# Altium PCB model_14.pcbdoc
Units mil, origin at the board's own origin, x right, y up, seen from the top; angles counter-clockwise.
Board outline 4982.81 x 6410.95 mil, 2 copper layers (Top Layer, Bottom Layer); 117 components, 106 nets, 381 pads, 47 vias.
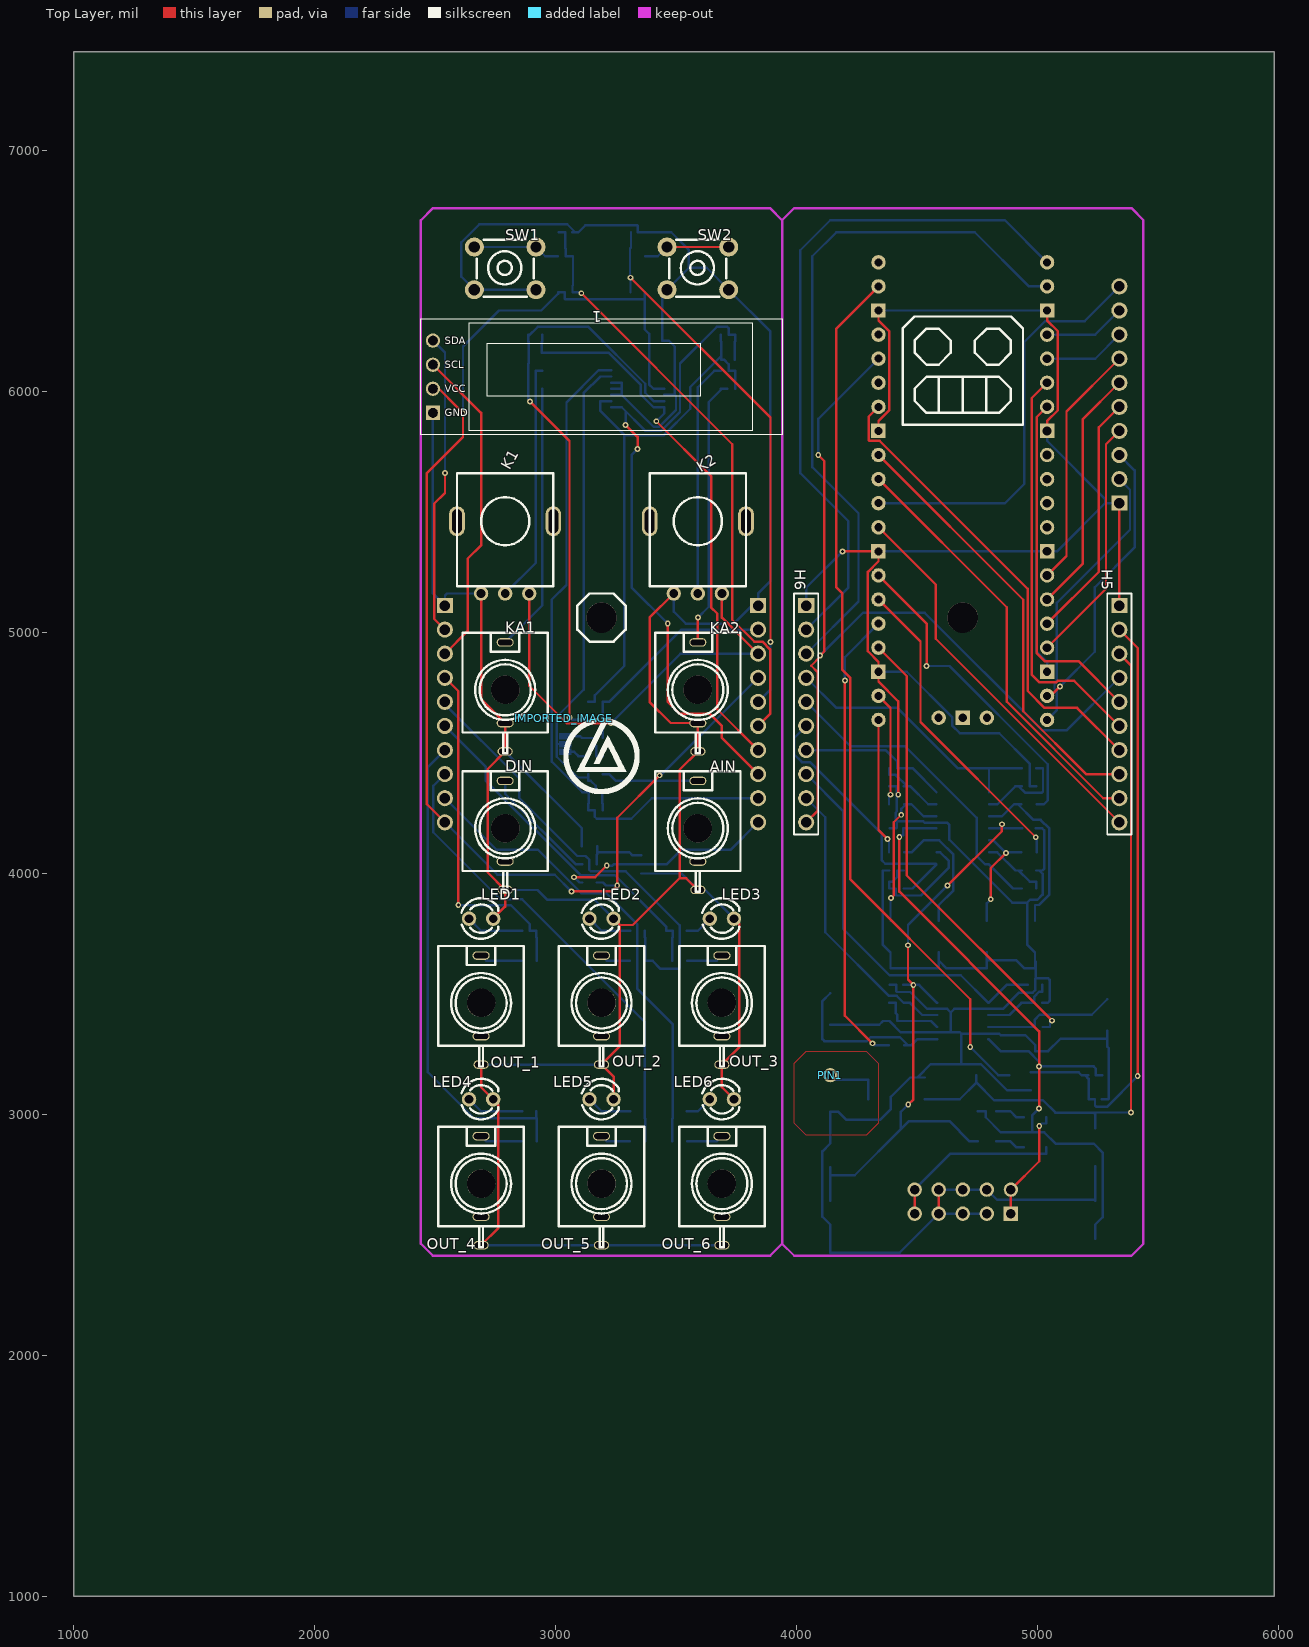
[diagram p0: Top Layer view]
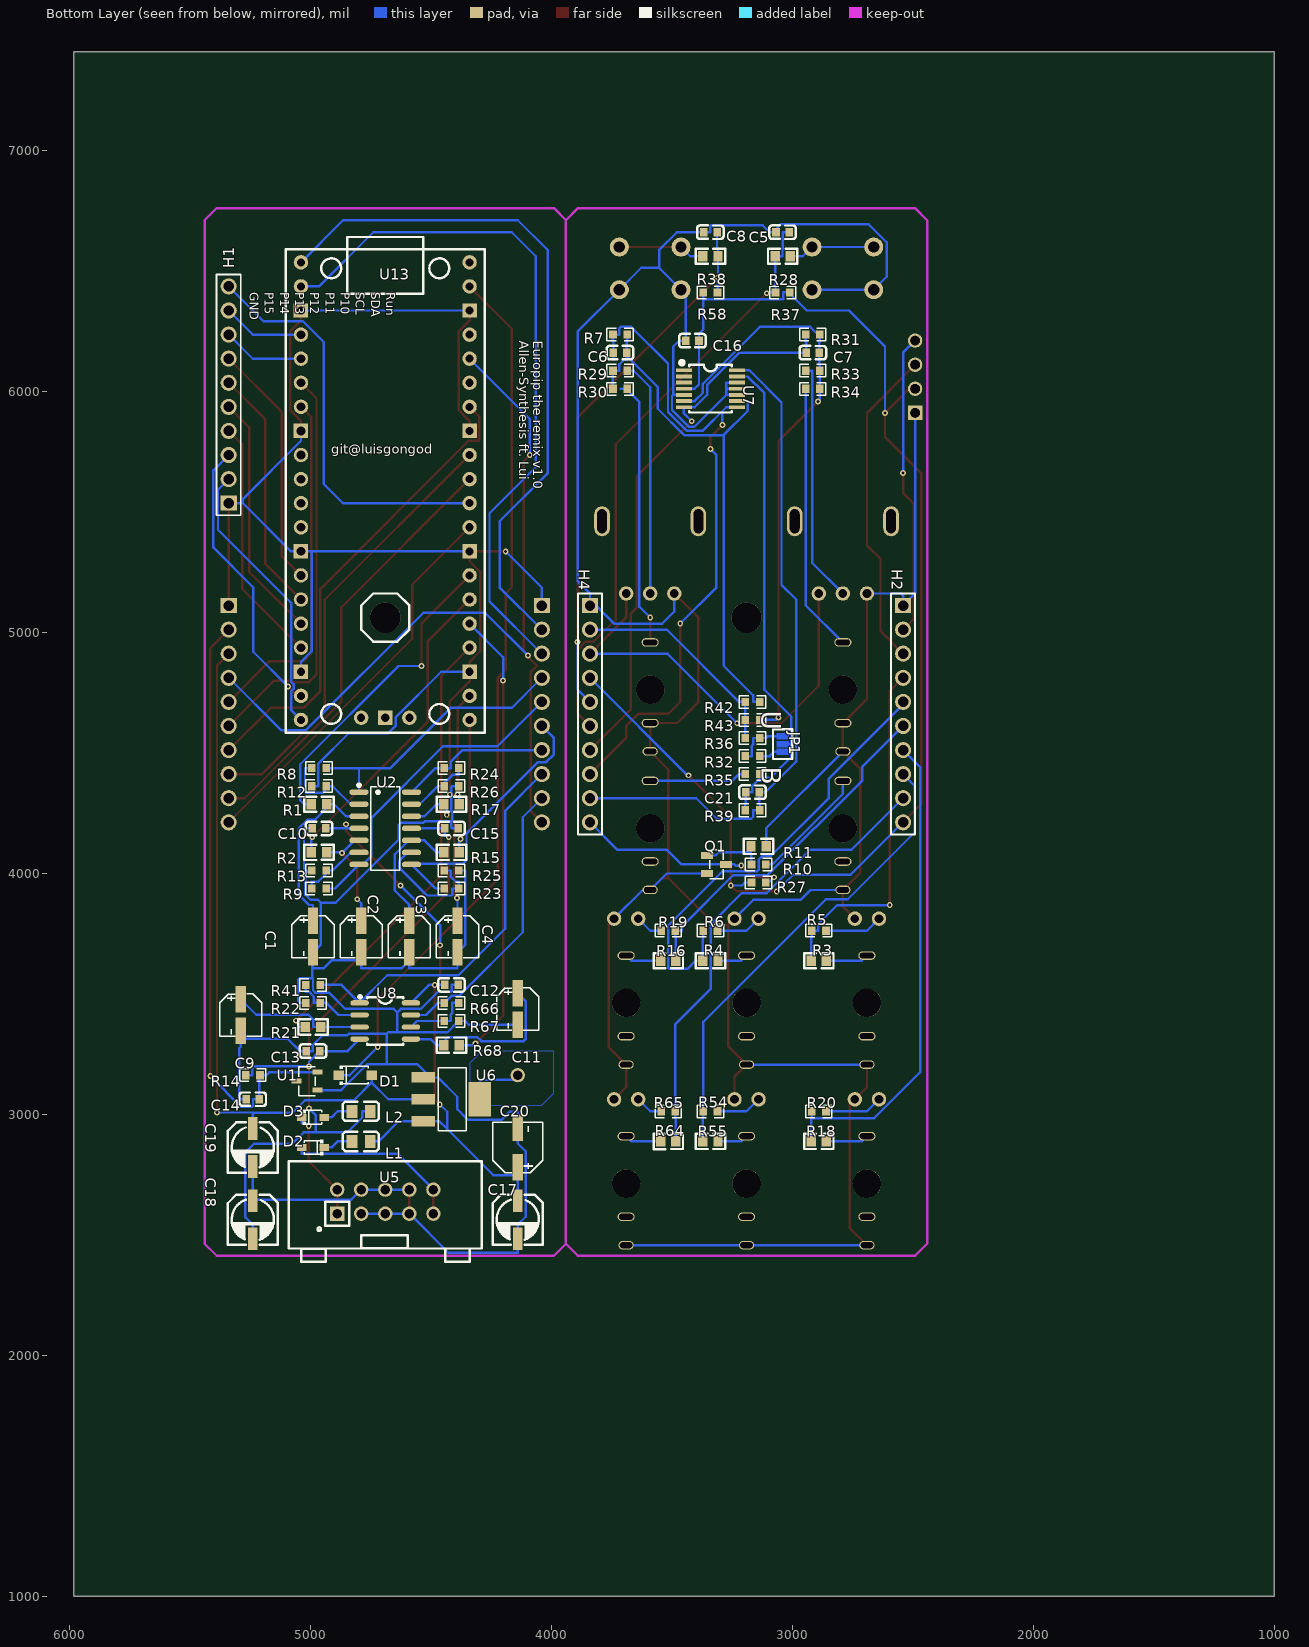
[diagram p1: Bottom Layer view, seen from below]

## Layer stack, top to bottom
Top Layer: signal copper (thickness not stored)
Dielectric: dielectric 12.6, FR-4, Dk 4.8
Bottom Layer: signal copper (thickness not stored)

## Board outline
5982.81,1000 1000,1000 1000,7410.95 5982.81,7410.95

## Components (designator, comment, footprint, x,y, rotation, side; value= is the part's Value field where it differs from the comment)
1 "DISPLAY-OLED-128X32" DISPLAY-OLED-128X32 3190.32,6062.53 r0 top
AIN "THONKICONN JACK" THONKICONN_JACK 3590.32,4187.53 r0 top
C1 "0.1uF" CAP-SMD_BD4.0-L4.3-W4.3-FD 4990.31,3737.53 r90 bottom
C2 "0.1uF" CAP-SMD_BD4.0-L4.3-W4.3-FD 4790.31,3737.53 r90 bottom
C3 "0.1uF" CAP-SMD_BD4.0-L4.3-W4.3-FD 4590.31,3737.53 r90 bottom
C4 "0.1uF" CAP-SMD_BD4.0-L4.3-W4.3-FD 4390.31,3737.53 r90 bottom
C5 "100nF" C0603 3040.32,6662.53 r0 bottom
C6 "10nF" C0603 3715.32,6162.53 r0 bottom
C7 "10nF" C0603 2915.32,6162.53 r180 bottom
C8 "100nF" C0603 3340.32,6662.53 r0 bottom
C9 "0.1uF" CAP-SMD_BD4.0-L4.3-W4.3-FD 5290.31,3412.53 r90 bottom
C10 "100nF" C0603 4965.31,4187.53 r180 bottom
C11 "0.1uF" CAP-SMD_BD4.0-L4.3-W4.3-FD 4140.31,3437.53 r90 bottom
C12 "100nF" C0603 4415.31,3537.53 r0 bottom
C13 "100nF" C0603 4990.31,3262.54 r0 bottom
C14 "100nF" C0603 5240.31,3062.54 r0 bottom
C15 "100nF" C0603 4415.31,4187.53 r180 bottom
C16 "100nF" C0603 3415.31,6212.53 r180 bottom
C17 "22uF" CAP-SMD_BD5.0-L5.3-W5.3-FD#1 4140.31,2562.54 r90 bottom
C18 "22uF" CAP-SMD_BD5.0-L5.3-W5.3-FD#1 5240.31,2562.54 r90 bottom
C19 "22uF" CAP-SMD_BD5.0-L5.3-W5.3-FD#1 5240.31,2862.54 r90 bottom
C20 "10uF" CAP-SMD_BD5.0-L5.3-W5.3-FD#2 4140.31,2862.54 r270 bottom
C21 "10nF" C0603 3165.32,4337.53 r0 bottom
D1 "1N4148W_C81598" SOD-123F_L2.7-W1.6-LS3.8-RD 4815.31,3162.54 r0 bottom
D2 "1N5819WS" SOD-323_L1.8-W1.3-LS2.5-RD 4990.31,2862.54 r180 bottom
D3 "1N5819WS" SOD-323_L1.8-W1.3-LS2.5-RD 4990.31,2987.54 r0 bottom
DIN "THONKICONN JACK" THONKICONN_JACK 2790.32,4187.53 r0 top
H1 "Header-Male-2.54_1x10" HDR-TH_10P-P2.54-V-M-1#1 5340.31,5987.53 r270 bottom
H2 "Header-Male-2.54_1x10" HDR-TH_10P-P2.54-V-M-1#1 2540.32,4662.53 r90 bottom
H4 "Header-Male-2.54_1x10" HDR-TH_10P-P2.54-V-M-1#1 3840.32,4662.53 r90 bottom
H5 "Header-Male-2.54_1x10" HDR-TH_10P-P2.54-V-M-1#2 5340.31,4662.53 r270 top
H6 "Header-Male-2.54_1x10" HDR-TH_10P-P2.54-V-M-1#2 4040.32,4662.53 r270 top
IMPORTED_IMAGE "IMPORTED_IMAGE" IMPORTED_IMAGE 3032.93,4645.01 r0 top
JP1 "JUMPER 3P NEW" JUMPERS_SMT-JUMPER_3_NC_PASTE_NO-SILK 3040.32,4537.53 r90 bottom
K1 "B100K" ALPHA9MM_TRIM 2790.32,5462.53 r0 top
K2 "B100K" ALPHA9MM_TRIM 3590.32,5462.53 r0 top
KA1 "THONKICONN JACK" THONKICONN_JACK 2790.32,4762.53 r0 top
KA2 "THONKICONN JACK" THONKICONN_JACK 3590.32,4762.53 r0 top
L1 "600Ω" L0805 4790.31,2887.54 r0 bottom
L2 "600Ω" L0805 4790.31,3012.54 r0 bottom
LED1 "204-10SURD/S530-A3-L" LED-TH_BD3.0-P2.54-FD 2690.32,3812.53 r0 top
LED2 "204-10SURD/S530-A3-L" LED-TH_BD3.0-P2.54-FD 3190.32,3812.53 r0 top
LED3 "204-10SURD/S530-A3-L" LED-TH_BD3.0-P2.54-FD 3690.32,3812.53 r0 top
LED4 "204-10SURD/S530-A3-L" LED-TH_BD3.0-P2.54-FD 2690.32,3062.53 r0 top
LED5 "204-10SURD/S530-A3-L" LED-TH_BD3.0-P2.54-FD 3190.32,3062.53 r0 top
LED6 "204-10SURD/S530-A3-L" LED-TH_BD3.0-P2.54-FD 3690.32,3062.53 r0 top
OUT_1 "THONKICONN JACK" THONKICONN_JACK 2690.32,3462.53 r0 top
OUT_2 "THONKICONN JACK" THONKICONN_JACK 3190.32,3462.53 r0 top
OUT_3 "THONKICONN JACK" THONKICONN_JACK 3690.32,3462.53 r0 top
OUT_4 "THONKICONN JACK" THONKICONN_JACK 2690.32,2712.53 r0 top
OUT_5 "THONKICONN JACK" THONKICONN_JACK 3190.32,2712.53 r0 top
OUT_6 "THONKICONN JACK" THONKICONN_JACK 3690.32,2712.53 r0 top
PIN1 "PAD" PADPAD 4140.31,3162.53 r0 top
Q1 "MMBT3904-C20526" SOT-23-3_L2.9-W1.3-P1.90-LS2.4-BR 3315.32,4037.53 r180 bottom
R1 "1K" R0603#1 4965.31,4287.53 r0 bottom
R2 "1K" R0603#1 4965.31,4087.53 r0 bottom
R3 "1K" R0603#1 2890.32,3637.53 r0 bottom
R4 "1K" R0603#1 3340.32,3637.53 r0 bottom
R5 "4.7kΩ" R0603#2 2890.32,3762.53 r0 bottom
R6 "4.7kΩ" R0603#2 3340.32,3762.53 r0 bottom
R7 "100kΩ" R0603#2 3715.32,6237.53 r0 bottom
R8 "220kΩ" R0603#2 4965.31,4437.53 r0 bottom
R9 "220kΩ" R0603#2 4965.31,3937.53 r0 bottom
R10 "100kΩ" R0603#2 3140.32,4037.53 r180 bottom
R11 "1M" R0603#1 3140.32,4112.53 r180 bottom
R12 "100kΩ" R0603#2 4965.31,4362.53 r0 bottom
R13 "100kΩ" R0603#2 4965.31,4012.53 r0 bottom
R14 "10kΩ" R0603#2 5240.31,3162.54 r0 bottom
R15 "1K" R0603#1 4415.31,4087.53 r180 bottom
R16 "1K" R0603#1 3515.32,3637.53 r180 bottom
R17 "1K" R0603#1 4415.31,4287.53 r180 bottom
R18 "1K" R0603#1 2890.32,2887.54 r0 bottom
R19 "4.7kΩ" R0603#2 3515.32,3762.53 r180 bottom
R20 "4.7kΩ" R0603#2 2890.32,3012.53 r0 bottom
R21 "1K" R0603#1 4990.31,3362.53 r0 bottom
R22 "100kΩ" R0603#2 4990.31,3462.53 r0 bottom
R23 "220kΩ" R0603#2 4415.31,3937.53 r180 bottom
R24 "220kΩ" R0603#2 4415.31,4437.53 r180 bottom
R25 "100kΩ" R0603#2 4415.31,4012.53 r180 bottom
R26 "100kΩ" R0603#2 4415.31,4362.53 r180 bottom
R27 "10kΩ" R0603#2 3140.32,3962.53 r180 bottom
R28 "1K" R0603#1 3040.32,6562.53 r180 bottom
R29 "150kΩ" R0603#2 3715.32,6087.53 r0 bottom
R30 "150kΩ" R0603#2 3715.32,6012.53 r0 bottom
R31 "100kΩ" R0603#2 2915.32,6237.53 r180 bottom
R32 "300kΩ" R0603#2 3165.32,4487.53 r0 bottom
R33 "150kΩ" R0603#2 2915.32,6087.53 r0 bottom
R34 "150kΩ" R0603#2 2915.32,6012.53 r0 bottom
R35 "300kΩ" R0603#2 3165.32,4412.53 r0 bottom
R36 "300kΩ" R0603#2 3165.32,4562.53 r0 bottom
R37 "10kΩ" R0603#2 3040.32,6412.53 r0 bottom
R38 "1K" R0603#1 3340.32,6562.53 r0 bottom
R39 "100kΩ" R0603#2 3165.32,4262.53 r0 bottom
R41 "220kΩ" R0603#2 4990.31,3537.53 r0 bottom
R42 "300kΩ" R0603#2 3165.32,4712.53 r0 bottom
R43 "300kΩ" R0603#2 3165.32,4637.53 r0 bottom
R54 "4.7kΩ" R0603#2 3340.32,3012.53 r0 bottom
R55 "1K" R0603#1 3340.32,2887.54 r0 bottom
R58 "10kΩ" R0603#2 3340.32,6412.53 r180 bottom
R64 "1K" R0603#1 3515.32,2887.54 r180 bottom
R65 "4.7kΩ" R0603#2 3515.32,3012.53 r180 bottom
R66 "220kΩ" R0603#2 4415.31,3462.53 r180 bottom
R67 "100kΩ" R0603#2 4415.31,3387.53 r180 bottom
R68 "1K" R0603#1 4415.31,3287.53 r180 bottom
SW1 "TL1105SPF250Q" KEY-TH_4P-L6.0-W6.0-P4.50-LS7.5 2790.32,6512.53 r0 top
SW2 "TL1105SPF250Q" KEY-TH_4P-L6.0-W6.0-P4.50-LS7.5 3590.32,6512.53 r0 top
U1 "LM4040C10IDBZR" SOT-23-3_L3.0-W1.7-P0.95-LS2.9-BR 5015.31,3137.54 r0 bottom
U2 "TL074CDR" SOIC-14_L8.7-W3.9-P1.27-LS6.0-BL 4690.31,4187.53 r90 bottom
U5 "1761608-3" IDC-TH_10P-P2.54-S2.54_L9.2-W20.3 4690.31,2637.54 r0 bottom
U6 "LM1117MP-5.0/TR" SOT-223-3_L6.5-W3.4-P2.30-LS7.0-BR 4415.31,3062.54 r180 bottom
U7 "MCP6004T-I/ST" TSSOP-14_L5.0-W4.4-P0.65-LS6.4-BL 3340.32,6012.53 r90 bottom
U8 "TL072CDT" SOIC-8_L5.0-W4.0-P1.27-LS6.0-BL 4690.31,3387.53 r90 bottom
U13 "RASPBERRY-PI-PICO" RASPBERRY-PI-PICO 4690.31,5587.53 r0 bottom
? "" ? 1996.16,4587.53 r0 top
? "" ? 3190.32,2323.75 r0 top
? "" ? 3940.32,1982.27 r0 top
? "" ? 4690.31,2160.84 r0 top

## Footprints (in the part's own frame and the unit in brackets; to place one, negate y for a bottom-side part, rotate by r counter-clockwise, add the part's x,y. Pads: shape width x height; smd on the part's side, far side on the other; paste and mask are expansions set on the pad)
ALPHA9MM_TRIM [mil]
  round 60 hole 35.98: 1(-100,-300)
  round 60 hole 36: 2(0,-300) 3(100,-300)
  oval 65x125 hole 40 slot 100 at 90 deg: 4(-200,0) 4(200,0)
  silkscreen extent -200,-270 200,200
C0603 [mm]
  rect 0.8x0.9 smd: 1(0.7,0) 2(-0.7,0)
  silkscreen extent -1.39,-0.72 1.41,0.71
CAP-SMD_BD4.0-L4.3-W4.3-FD [mm]
  rect 2.8x1.1 smd: 1(1.66,0) 2(-1.66,0)
  silkscreen extent -2.24,-2.23 2.22,2.23
CAP-SMD_BD5.0-L5.3-W5.3-FD#1 [mm]
  rect 2.4x1 smd: 1(2,0) 2(-2,0)
  silkscreen extent -2.65,-2.65 2.65,2.65
CAP-SMD_BD5.0-L5.3-W5.3-FD#2 [mm]
  rect 2.8x1.1 smd: 1(2.1,0) 2(-2.1,0)
  silkscreen extent -2.66,-2.65 2.66,2.62
DISPLAY-OLED-128X32 [mil]
  rect 59.37x59.37 hole 39.36: 1(-700,-150)
  round 59.37 hole 39.36: 2(-700,-50) 3(-700,50) 4(-700,150)
  silkscreen extent -750,-240 750,240
HDR-TH_10P-P2.54-V-M-1#1 [mm]
  rect 1.575x1.7 hole 1.1: 1(11.43,0)
  round 1.7 hole 1.1: 2(8.89,0) 3(6.35,0) 4(3.81,0) 5(1.27,0) 6(-1.27,0) 7(-3.81,0) 8(-6.35,0) 9(-8.89,0) 10(-11.43,0)
  silkscreen extent -12.7,-1.27 12.7,1.27
HDR-TH_10P-P2.54-V-M-1#2 [mm]
  rect 1.575x1.7 hole 1.1: 1(-11.43,0)
  round 1.7 hole 1.1: 2(-8.89,0) 3(-6.35,0) 4(-3.81,0) 5(-1.27,0) 6(1.27,0) 7(3.81,0) 8(6.35,0) 9(8.89,0) 10(11.43,0)
  silkscreen extent -12.7,-1.27 12.7,1.27
IDC-TH_10P-P2.54-S2.54_L9.2-W20.3 [mil]
  rect 60x60 hole 39.37: 1(199.94,50.05)
  round 60 hole 39.37: 2(200.04,-50.05) 3(99.96,50.01) 4(100.04,-50.05) 5(-0.04,50.01) 6(0.04,-50.05) 7(-100.04,50.01) 8(-99.96,-50.05) 9(-200.04,50.01) 10(-199.96,-50.05)
  silkscreen extent -400,-167 400,250
IMPORTED_IMAGE [mil]
  silkscreen extent 0,-315 315,0
JUMPERS_SMT-JUMPER_3_NC_PASTE_NO-SILK [mil]
  round 0 smd: 1(32,0) 2(0,0) 3(-32,0)
  Top Layer region: 12.5,-25 -12.5,-25 -12.5,25 12.5,25
  Top Layer region: -19.5,-25 -44.5,-25 -44.5,25 -19.5,25
  Top Layer region: 44.5,-25 19.5,-25 19.5,25 44.5,25
  silkscreen extent -62,-40 62,40
KEY-TH_4P-L6.0-W6.0-P4.50-LS7.5 [mm]
  round 2 hole 1.2: 1(-3.25,-2.25) 2(3.25,-2.25) 3(3.25,2.25) 4(-3.25,2.25)
  silkscreen extent -3,-3 3,3
L0805 [mil]
  rect 44.59x54.21 smd: 1(38.05,0) 2(-38.04,0)
  silkscreen extent -73,-40 77,40
LED-TH_BD3.0-P2.54-FD [mil]
  round 60 hole 36: 1(-50,0) 2(50,0)
  silkscreen extent -81,-84 72,85
PADPAD [mm]
  round 1.5 hole 1: 1(0,0)
R0603#1 [mm]
  rect 1x1.1 smd: 1(0.8,0) 2(-0.8,0)
  silkscreen extent -1.55,-0.81 1.55,0.8
R0603#2 [mm]
  rect 0.806x0.864 smd: 1(0.753,0) 2(-0.753,0)
  silkscreen extent -1.39,-0.66 1.39,0.66
RASPBERRY-PI-PICO [mil]
  round 60 hole 33.46: 1(350,-950) 2(350,-850) 19(350,850) 20(350,950) 21(-350,950) 22(-350,850) 24(-350,650) 25(-350,550) 26(-350,450) 27(-350,350) 29(-350,150) 30(-350,50) 31(-350,-50) 32(-350,-150) 34(-350,-350) 35(-350,-450) 36(-350,-550) 37(-350,-650) 39(-350,-850) 40(-350,-950) 41(100,940.94) 43(-100,940.94)
  rect 60x60 hole 33.46: 3(350,-750) 18(350,750) 23(-350,750) 28(-350,250) 33(-350,-250) 38(-350,-750) 42(0,940.94)
  round 60 hole 36: 4(350,-650) 5(350,-550) 6(350,-450) 7(350,-350) 9(350,-150) 10(350,-50) 11(350,50) 12(350,150) 14(350,350) 15(350,450) 16(350,550) 17(350,650)
  rect 60x60 hole 36: 8(350,-250) 13(350,250)
  silkscreen extent -413,-1055 413,1004
SOD-123F_L2.7-W1.6-LS3.8-RD [mm]
  rect 1.1x1 smd: 1(1.735,0) 2(-1.735,0)
  silkscreen extent -1.38,-1 1.6,1
SOD-323_L1.8-W1.3-LS2.5-RD [mm]
  rect 1x0.75 smd: 1(1.173,0) 2(-1.173,0)
  silkscreen extent -0.9,-0.8 1.08,0.8
SOIC-8_L5.0-W4.0-P1.27-LS6.0-BL [mil]
  oval 22.38x76.78 smd: 1(75,106.5) 2(25,106.5) 3(-25,106.5) 4(-75,106.5) 5(-75,-106.5) 6(-25,-106.5) 7(25,-106.5) 8(75,-106.5)
  silkscreen extent -98,-75 106,111
SOIC-14_L8.7-W3.9-P1.27-LS6.0-BL [mil]
  oval 22.6x80.24 smd: 1(150,109.02) 2(100,109.02) 3(50,109.02) 4(0,109.02) 5(-50,109.02) 6(-100,109.02) 7(-150,109.02) 8(-150,-109.02) 9(-100,-109.02) 10(-50,-109.02) 11(0,-109.02) 12(50,-109.02) 13(100,-109.02) 14(150,-109.02)
  silkscreen extent -173,-60 185,115
SOT-23-3_L2.9-W1.3-P1.90-LS2.4-BR [mm]
  rect 1.25x0.7 smd: 1(-1,0.95) 2(-1,-0.95) 3(1,0)
  silkscreen extent -0.73,-1.53 0.73,1.53
SOT-23-3_L3.0-W1.7-P0.95-LS2.9-BR [mm]
  rect 1.037x0.532 smd: 1(-1.101,0.95) 2(-1.101,-0.95) 3(1.101,0)
  silkscreen extent -0.86,-1.53 0.86,1.53
SOT-223-3_L6.5-W3.4-P2.30-LS7.0-BR [mm]
  rect 2.5x1.1 smd: 1(-2.97,2.3) 2(-2.97,0) 3(-2.97,-2.3)
  rect 2.34x3.6 smd: 4(2.97,0)
  silkscreen extent -1.37,-3.33 1.57,3.33
THONKICONN_JACK [mm]
  oval 1.6x0.9 hole 0.6 slot 1.3 at 0 deg: 1(0,-6.5)
  oval 1.8x0.9 hole 0.6 slot 1.5 at 0 deg: 2(0,-3.5) 3(0,5)
  round 3 hole 3 unplated: ""(0,0)
  silkscreen extent -4.5,-6.7 4.5,6
TSSOP-14_L5.0-W4.4-P0.65-LS6.4-BL [mm]
  rect 0.4x1.7 smd: 1(1.95,2.8) 2(1.3,2.8) 3(0.65,2.8) 4(0,2.8) 5(-0.65,2.8) 6(-1.3,2.8) 7(-1.95,2.8) 8(-1.95,-2.8) 9(-1.3,-2.8) 10(-0.65,-2.8) 11(0,-2.8) 12(0.65,-2.8) 13(1.3,-2.8) 14(1.95,-2.8)
  silkscreen extent -2.5,-2.25 2.95,3.2
? [mil]

## Free pads (board coordinates)
  round 125.98 hole 125.98 unplated: ""(3190.32,5062.53) ""(4690.32,5062.53)

## Via types
v1: diameter 24.02, hole 12.01, Top Layer to Bottom Layer, tented both sides, 40 vias
v2: diameter 24.41, hole 12, Top Layer to Bottom Layer, tented both sides, 6 vias
v3: diameter 24.02, hole 12, Top Layer to Bottom Layer, tented both sides, 1 vias

## Nets (pads, with @x,y where several pads share a name; then routed paths per layer and width w, separated by ;. In a path a pad name is that pad's centre, name@x,y a point inside that pad or via, vN(x,y) a via of type N, cw(c..) or ccw(c..) an arc to the next point about the centre after c; other vN are vias at no path point)
3V3: H5.4 H6.10 U13.36 | length 3699.3
  Top Layer w10: H6.10 4087.11,4259.32 4087.11,4836.46 4061.04,4862.53 4098.14,4899.63 v1(4098.14,4904.71) ; v1(4090.32,5737.53) 4115.31,5712.53 4115.32,4921.93 v1(4098.14,4904.71)
  Bottom Layer w10: v1(4090.32,5737.53) 4090.32,5887.54 U13.36 ; v1(4098.14,4904.71) 4275.91,5082.48 4531.82,5082.48 5019.18,4595.12 5122.9,4595.12 H5.4
3V3P: 1.2 C16.1 H2.10 H4.4 R27.2 R37.2 R58.2 U7.4 | length 5613.8
  Top Layer w10: 1.2 2515.32,6012.53 2590.32,5937.53 v3(2615.32,5912.53) 2615.32,5812.53 2465.32,5662.53 2465.32,4287.52 H2.10 ; v1(3065.26,3925.69) 3231.16,3925.69 v1(3255.76,3950.29) 3255.76,4231.52 v1(3431.8,4407.56)
  Bottom Layer w10: H2.10 2758.09,3994.76 2996.19,3994.76 v1(3065.26,3925.69) ; v3(2615.32,5912.53) 2615.32,6187.53 2765.32,6337.53 2940.32,6337.53 3010.66,6407.87 R37.2 3037.53,6412.53 3037.53,6385.66 3038.73,6384.46 3369.98,6384.46 ; R27.2 3196.84,3962.53 3209.08,3950.29 v1(3255.76,3950.29) ; R58.2 3369.98,6384.46 ; v1(3431.8,4407.56) 3435.35,4407.56 H4.4 ; U7.4 3406.1,6012.53 3387.76,6030.87 C16.1 3387.76,6226.89 3387.76,6241.24 3369.98,6259.02 3369.98,6384.46
5V: C19.1 D1.2 H5.3 U6.2 | length 2960.8
  Top Layer w10: H5.3 5388.84,4864 v1(5388.84,3007.56)
  Bottom Layer w10: U6.2 4677.68,3062.54 4747.01,3131.87 ; D1.2 4747.01,3135.84 4747.01,3131.87 ; C19.1 5240.31,2999.52 5235.23,3004.6 5235.23,3007.11 ; v1(5388.84,3007.56) 5235.68,3007.56 5235.23,3007.11 ; 4747.01,3131.87 4820.34,3058.54 5023.3,3058.54 5074.73,3007.11 5235.23,3007.11
5VP: H4.3 K1.3 K2.3 | length 1828.9
  Top Layer w10: K1.3 2890.32,4779.8 3046.12,4624 v1(3229.25,4624) ; K2.3 3690.32,5062.53 H4.3
  Bottom Layer w10: v1(3229.25,4624) 3517.78,4912.53 H4.3
+12V: C10.1 C12.1 C17.1 C20.1 L1.2 U2.4 U6.3 U8.8 | length 2664.3
  Top Layer w10: v1(4462.75,3702.26) 4462.75,3559.85 v1(4485.06,3537.54) 4485.06,3062.23 v1(4464.1,3041.27) ; v1(4627.05,3949.85) 4852.87,4175.67 v1(4852.87,4204.42)
  Bottom Layer w10: C17.1 C20.1@4140.32,2746.81 ; C20.1 C20.1@4140.32,2746.81 ; C12.1 v1(4485.06,3537.54) 4508.81,3537.54 U8.8 ; v1(4462.75,3702.26) 4462.75,3785.55 v1(4627.05,3949.85) ; v1(4464.1,3041.27) 4433.25,3010.42 4433.25,2938.54 ; L1.2 4718.98,2887.54 4634.53,2971.99 U6.3 4472.04,2971.99 4466.7,2971.99 4433.25,2938.54 ; U2.4 4852.69,4187.54 ; v1(4852.87,4204.42) 4852.69,4204.24 4852.69,4187.54 ; C10.1@4937.75,4187.53 4911.01,4187.53 4852.69,4187.53 ; C20.1@4140.32,2746.81 4241.52,2746.81 4433.25,2938.54
+V: D2.2 U5.9 U5.10 | length 733.8
  Top Layer w10: U5.9 4490.27,2687.51 U5.10@4490.35,2687.59
  Bottom Layer w10: U5.10@4490.35,2687.59 4639.48,2836.72 5036.4,2836.72 5036.47,2836.79 D2.2
-10V: C14.2 H5.2 R14.2 U1.2 | length 2521.1
  Top Layer w10: H5.2 5416.58,4936.26 v1(5416.58,3158.59)
  Bottom Layer w10: U1.2@4971.95,3174.94 5171.39,3174.94 5183.79,3162.54 R14.2@5197.22,3162.54 ; R14.2@5210.65,3162.54 R14.2@5197.22,3162.54 ; v1(5416.58,3158.59) 5288.67,3030.68 5245.18,3030.68 5239.49,3036.37 5239.49,3062.54 5212.75,3062.54 5212.75,3147.01 R14.2@5197.22,3162.54
-10VP: H4.2 R36.1 R42.1 R43.1 | length 919.6
  Bottom Layer w10: R36.1 R43.1 R42.1 3221.84,4712.53 3521.84,5012.53 H4.2
-12V: C13.2 C15.2 C18.2 L2.2 R14.1 U2.11 U8.4 | length 3201.2
  Top Layer w10: v1(4426.95,4151.55) 4426.95,3924.76 5007.07,3344.64 v1(5007.07,3198.96) v1(5007.07,3024.39)
  Bottom Layer w10: v1(4426.95,4151.55) 4434.23,4158.83 4442.87,4158.83 C15.2 U2.11 ; L2.2 4785.55,3012.54 4785.55,2987.58 4847.42,2925.71 4978.42,2925.71 ; U8.4 4846.81,3262.54 4962.75,3262.54 5007.07,3218.22 v1(5007.07,3198.96) 5233.55,3198.96 5243.1,3189.41 5243.1,3162.54 R14.1 ; v1(5007.07,3024.39) 4978.42,2995.74 4978.42,2925.71 ; C18.2 5240.31,2542.04 5271.06,2572.79 5271.06,2841.67 5234.39,2878.34 5075.46,2878.34 5028.09,2925.71 4978.42,2925.71
-V: D3.1 U5.1 U5.2 | length 471.4
  Top Layer w10: U5.1@4890.25,2587.49 4890.25,2687.49 4890.35,2687.59 5008,2805.24 v1(5008,2951.75)
  Bottom Layer w10: v1(5008,2951.75) 5018.04,2961.79 5036.47,2961.79 D3.1
ADC_1: H5.7 U13.34 | length 1978
  Top Layer w10: U13.34 4299.25,5896.47 4299.25,5799.02 4302.16,5796.11 4345.53,5796.11 4959.83,5181.81 4959.83,4757.53 5029.83,4687.53 5165.31,4687.53 H5.7
ADC_1P: C7.2 H4.7 R31.2 U7.7 | length 2312.6
  Top Layer w10: v1(3417.94,5877.55) 3645.32,5650.13 3645.32,5104.63 3670.62,5079.43 3670.62,4682.23 H4.7
  Bottom Layer w10: R31.2 2944.97,6209.53 2942.87,6207.43 C7.2 3219.29,6162.53 3353.92,6027.9 3353.92,5987.94 3406.1,5935.76 U7.7 3450.56,5910.17 v1(3417.94,5877.55)
ADC_2: H5.8 U13.32 | length 1820.1
  Top Layer w10: U13.32 4941.37,5136.47 4941.37,4673.42 5202.26,4412.53 H5.8
ADC_2P: C6.1 H4.8 R7.1 U7.8 | length 2810.4
  Top Layer w10: v2(3290.32,5862.53) 3340.32,5812.53 v2(3340.32,5762.53) ; v2(3465.32,5037.53) 3465.32,4712.53 3515.32,4662.53 3640.32,4662.53 3690.32,4612.53 3690.32,4562.53 H4.8
  Bottom Layer w10: U7.8 3274.53,5935.76 3372.62,5837.67 3437.64,5837.67 3516.28,5916.31 3516.28,6116.92 3669.13,6269.77 3712.73,6269.77 3718.1,6264.4 3718.1,6237.53 R7.1 3744.97,6209.53 3742.87,6207.43 C6.1 3742.87,6133.83 ; v2(3290.32,5862.53) 3290.32,5915.46 ; v2(3340.32,5762.53) 3315.32,5737.53 3315.32,5712.53 3315.32,5187.53 v2(3465.32,5037.53)
AIN: H5.9 U13.31 | length 1778.2
  Top Layer w10: U13.31 4872.68,5105.16 4872.68,4713.61 5273.76,4312.53 H5.9
AIN_3: AIN.3 R35.1 | length 407
  Bottom Layer w10: R35.1 3221.84,4412.53 3249.99,4384.38 AIN.3
AIN_P: C21.2 H4.9 R39.2 U7.14 | length 2809.7
  Bottom Layer w10: U7.14 3178.28,6089.3 3044.98,5956 3044.98,5198.16 2983.79,5136.97 2983.79,4464.76 3111.02,4337.53 C21.2 3137.76,4292.63 3135.66,4290.53 R39.2 3162.53,4262.53 3162.53,4235.66 3170.82,4227.37 3313.69,4227.37 3398.85,4312.53 H4.9
AO_1: H6.4 R8.2 U2.1 | length 1150.7
  Bottom Layer w10: H6.4 4165.32,4687.53 4418.92,4687.53 4668.92,4437.53 4799.34,4437.53 ; U2.1 4799.34,4437.53 ; R8.2 4799.34,4437.53
AO_1P: H2.4 R3.1 R5.1 | length 1476.3
  Top Layer w10: H2.4 2595.8,4757.05 v1(2595.8,3868.92)
  Bottom Layer w10: v1(2595.8,3868.92) 2813.6,3868.92 2893.11,3789.41 2893.11,3762.54 R5.1 2919.98,3748.54 2919.98,3734.54 2921.81,3732.71 R3.1
AO_2: H6.5 R9.2 U2.7 | length 1308.8
  Bottom Layer w10: H6.5 4224.26,4528.59 4450.69,4528.59 4748.17,4231.11 4748.17,4073.26 4783.89,4037.54 U2.7 4899.35,3937.53 R9.2
AO_2P: H2.5 R4.1 R6.1 | length 1897.3
  Bottom Layer w10: H2.5 2540.32,4702.14 2848.52,4393.94 2848.52,4313.84 3089.65,4072.71 3124.34,4072.71 3139.56,4057.49 3139.56,4015.78 3145.9,4009.44 3290.39,4009.44 3515.32,3784.51 3515.32,3609.32 3510.07,3604.07 3435.96,3604.07 3402.49,3637.54 R4.1 3371.81,3732.71 3369.98,3734.54 3369.98,3758.52 R6.1
AO_3: H6.6 R23.2 U2.8 | length 1161.1
  Bottom Layer w10: H6.6 3990.38,4562.59 3990.38,4494.62 4022.49,4462.51 4056.55,4462.51 4353.08,4165.98 4353.08,4055.78 4368.25,4040.61 4578.23,4040.61 U2.8 4481.3,3937.54 R23.2
AO_3P: H2.6 R16.1 R19.1 | length 1466.7
  Bottom Layer w10: H2.6 2709.3,4443.55 2709.3,4386.61 3102.56,3993.35 3245.32,3993.35 3458.8,3779.87 3458.8,3762.54 R19.1 3485.66,3748.54 3485.66,3734.54 3483.83,3732.71 R16.1
AO_4: H6.7 R24.2 U2.14 | length 629.2
  Bottom Layer w10: H6.7 4369.98,4512.53 4418.11,4464.4 4418.11,4437.54 R24.2 4481.3,4437.54 U2.14
AO_4P: H2.7 R18.1 R20.1 | length 2021.9
  Bottom Layer w10: H2.7 2469.64,4441.85 2469.64,3175 2660.17,2984.47 2919.91,2984.47 2919.98,2984.54 ; R20.1 2919.98,3002.38 2919.98,2984.54 ; R18.1 2921.81,2982.71 2919.98,2984.54
AO_5: H6.8 R41.2 U8.1 | length 1631.5
  Bottom Layer w10: H6.8 4192.88,4259.97 4192.88,3770.68 4386.1,3577.46 4681.89,3577.46 U8.1 4871.81,3537.54 R41.2
AO_5P: H2.8 R54.1 R55.1 | length 1962.8
  Bottom Layer w10: H2.8 2491.77,4363.98 2491.77,4171.19 2770.06,3892.9 2860.85,3892.9 3369.98,3383.77 R54.1 3369.98,2998.54 3369.98,2984.54 3371.81,2982.71 R55.1
AO_6: H6.9 R66.2 U8.7 | length 1195.7
  Bottom Layer w10: H6.9 4119.53,4233.32 4119.53,3756.33 4384.25,3491.61 4415.9,3491.61 R66.2 4471.84,3462.54 4521.84,3412.54 U8.7
AO_6P: H2.9 R64.1 R65.1 | length 1978.8
  Bottom Layer w10: H2.9 2754.59,4098.26 2926.43,4098.26 3106.28,3918.41 3210.02,3918.41 3339.57,3788.86 3339.57,3521.11 3485.66,3375.02 R65.1 3485.66,2998.54 3485.66,2984.54 3483.83,2982.71 R64.1
C11_1: C11.1 R68.2 U8.5 | length 730.4
  Bottom Layer w10: C11.1 4107.61,3470.2 4107.61,3312.32 4116.01,3303.92 4291.42,3303.92 4308.4,3320.9 4428.8,3320.9 R68.2@4462.16,3287.54 ; R68.2 R68.2@4462.16,3287.54 ; U8.5 4502.49,3312.54 4477.49,3287.54 R68.2@4462.16,3287.54
D1_1: D1.1 U13.39 | length 3671.4
  Top Layer w10: U13.39 4165.32,6262.53 4165.32,5187.53 4190.32,5162.53 4190.32,4845.13 4223.92,4811.53 4223.92,3975.33 4721.32,3478.03 v1(4721.32,3279.69)
  Bottom Layer w10: v1(4721.32,3279.69) 4838.47,3162.54 D1.1
DIN_1: H5.10 U13.29 | length 1639.2
  Top Layer w10: U13.29 4578.04,5199.8 4578.04,4974.8 H5.10
DIN_3: DIN.3 R10.1 | length 495.3
  Bottom Layer w10: DIN.3 2790.32,4331.01 3083.8,4037.53 R10.1
DIN_P: H4.10 Q1.3 R27.1 | length 901.7
  Top Layer w10: v1@3076.4,3984.56 3163.95,3984.56 v1(3212.05,4032.66)
  Bottom Layer w10: v1(3076.4,3984.55) 3098.42,3962.53 R27.1 ; v1(3212.05,4032.66) 3235.48,4032.66 3240.35,4037.53 Q1.3 3459.8,4037.53 3520.52,4098.25 3726.04,4098.25 H4.10
GND: C1.2 C2.2 C3.2 C4.2 C9.2 C10.2 C11.2 C12.2 C13.1 C14.1 C15.1 C17.2 C18.1 C19.2 C20.2 H1.1 H5.1 H6.1 R12.1 R13.1 R22.1 R25.1 R26.1 R67.1 U1.1 U5.3 U5.4 U5.5 U5.6 U5.7 U5.8 U6.1 U13.3 U13.8 U13.13 U13.18 U13.23 U13.28 U13.33 U13.38 | length 15577.9
  Top Layer w10: v2(4190.32,5337.53) U13.28 4340.31,5296.54 4296.1,5252.33 4296.1,5112.53 4296.1,4922.73 4340.31,4878.52 4340.31,4858.03 4340.31,4855.21 4340.31,4846.37 4340.31,4844.48 U13.23 4340.31,4796.54 4422.44,4714.41 v1(4422.44,4327.36) ; U13.33 4340.31,5878.52 4384.51,5922.72 4384.51,6252.34 4340.31,6296.54 U13.38 ; U5.7 4590.27,2687.51 U5.8@4590.35,2687.59 ; U13.8 5040.31,5878.52 5084.51,5922.72 5084.51,6252.34 5040.31,6296.54 U13.3 ; H5.1 H1.1
  Bottom Layer w10: H6.1 4040.32,5187.53 v2(4190.32,5337.53) ; C11.2 4343.42,3372.16 4358.8,3387.54 R67.1 4432.91,3340.29 4640.28,3340.29 ; U13.23 4457.98,4837.53 4645.98,4649.53 4645.98,4614.71 4678.53,4582.16 4841.95,4582.16 4968.03,4456.08 4968.03,4362.6 4968.1,4362.53 R12.1 ; U13.28 4995.94,5337.53 ; U13.38 U13.3 ; R25.1 4358.8,4012.54 4357.62,4011.36 4357.62,3704.86 C4.2 4390.32,3606.05 4590.32,3606.05 C3.2@4590.32,3639.11 ; R26.1 4412.53,4362.54 4416.07,4359 v1@4416.07,4327.36 ; C12.2@4387.75,3537.54 4414.49,3537.54 4414.49,3510.8 4417.47,3507.82 4472.4,3507.82 4542.68,3437.54 4625.67,3437.54 4640.28,3422.93 ; C15.1 4414.49,4187.54 4416.07,4189.12 4416.07,4216.32 ; v1(4422.44,4327.36) v1@4416.07,4327.36 ; U6.1 U6.1@4502.15,3153.09 ; C3.2 C3.2@4590.32,3639.11 ; U5.8@4590.35,2687.59 4690.35,2687.59 4790.35,2687.59 4832.38,2645.56 C18.1@5240.31,2645.56 ; U5.3 U5.5 U5.7 4428.31,2425.57 4140.32,2425.57 4140.32,2454.69 C17.2 4140.32,2542.04 4107.29,2575.07 4107.29,2846.08 4140.32,2879.11 C20.2 4140.32,3011.33 4172.96,3011.33 4206.02,2978.27 4348.28,2978.27 4391.75,3021.74 4391.75,3072.8 4472.04,3153.09 U6.1@4502.15,3153.09 ; C2.2 C2.2@4790.31,3639.11 ; U1.1@4971.95,3100.14 4873.83,3100.14 4766.01,3207.96 4684.12,3207.96 ; C10.2 5019.61,4187.53 5027.9,4179.24 5027.9,4018.6 5021.83,4012.53 R13.1@5008.4,4012.53 ; R13.1 R13.1@5008.4,4012.53 ; R22.1 5042.87,3462.54 5050.91,3470.58 5050.91,3558.42 5043.72,3565.61 4993.41,3565.61 ; U13.18 5040.31,4878.52 4995.94,4922.89 4995.94,5337.53 ; U13.8 5040.31,5796.54 5281.3,5555.55 5281.3,5537.53 ; C18.1 C18.1@5240.31,2645.56 ; C19.2 C18.1@5240.31,2645.56 ; C14.1 5294.61,3062.54 5296.9,3064.83 5296.9,3274.46 5290.31,3281.05 C9.2@5290.31,3314.11 ; C9.2 C9.2@5290.31,3314.11 ; H1.1 5281.3,5537.53 ; 4416.07,4216.32 4411.9,4220.49 4411.9,4253.15 4416.07,4257.32 v1@4416.07,4327.36 ; 4416.07,4216.32 4526,4216.32 4532.42,4209.9 4626.26,4209.9 4634.97,4201.19 4634.97,4140.2 4896.48,3878.69 4957.6,3878.69 ; U6.1@4502.15,3153.09 4557.02,3207.96 4684.12,3207.96 ; C3.2@4590.32,3639.11 4623.38,3606.05 4790.31,3606.05 C2.2@4790.31,3639.11 ; 4640.28,3340.29 4640.28,3422.93 ; 4640.28,3340.29 4678.89,3340.29 4684.12,3335.06 ; 4640.28,3422.93 4654.89,3437.54 4856.7,3437.54 4924.32,3505.16 4980.57,3505.16 4990.5,3515.09 4990.5,3562.7 4993.41,3565.61 ; 4684.12,3207.96 4684.12,3335.06 ; 4684.12,3335.06 4841.03,3335.06 4847.83,3328.26 4950.06,3328.26 4991.13,3287.19 4991.13,3262.54 C13.1 5044.61,3262.54 5096.18,3314.11 C9.2@5290.31,3314.11 ; C2.2@4790.31,3639.11 4913.36,3639.11 4946.42,3606.05 4990.31,3606.05 C1.2@4990.31,3636.74 ; 4957.6,3878.69 4969.71,3890.8 5000.2,3890.8 5021.91,3912.51 5021.91,3999.02 R13.1@5008.4,4012.53 ; 4957.6,3878.69 4957.6,3704.87 C1.2 C1.2@4990.31,3636.74 ; C1.2@4990.31,3636.74 4993.41,3633.64 4993.41,3565.61 ; 4995.94,5337.53 U13.13 5060.81,5337.53 5081.3,5337.53 5281.3,5537.53
GNDP: 1.1 AIN.1 C5.1 C8.1 C16.2 DIN.1 H2.1 H4.1 K1.1 K2.1 KA1.1 KA1.2 KA2.1 KA2.2 LED1.2 LED2.2 LED3.2 LED4.2 LED5.2 LED6.2 OUT_1.1 OUT_2.1 OUT_3.1 OUT_4.1 OUT_5.1 OUT_6.1 Q1.2 R11.1 SW1.1 SW1.2 SW2.1 SW2.2 U7.5 U7.10 U7.11 U7.12 | length 14666.4
  Top Layer w10: OUT_4.1 2762.44,2528.74 2762.44,3040.41 LED4.2 2690.32,3112.53 OUT_1.1 ; K1.1 2690.32,4724.74 KA1.2 KA1.1 2717.73,4434.03 2717.73,4004.21 DIN.1 2790.32,3862.53 LED1.2 ; LED5.2 3240.32,3156.62 OUT_2.1 3266.81,3283.11 3266.81,3786.04 ; LED2.2 3266.81,3786.04 ; K2.1 3390.32,5062.53 3390.32,4712.53 3478.11,4624.74 KA2.2 KA2.1 3514.61,4430.91 3514.61,3980.31 ; AIN.1 3541.63,3980.31 3514.61,3980.31 ; LED6.2 3690.32,3112.53 OUT_3.1 3762.95,3279.25 3762.95,3789.9 LED3.2 ; 3266.81,3786.04 3320.34,3786.04 3514.61,3980.31
  Bottom Layer w10: 1.1@2499.65,5912.53 1.1 2490.32,5162.53 H2.1 2540.32,5154.53 2548.32,5162.53 K1.1 ; OUT_4.1 OUT_5.1 OUT_6.1 ; OUT_1.1 OUT_2.1 ; DIN.1 2924.31,3931.62 2965.55,3890.38 3162.47,3890.38 LED2.2 ; KA1.1 3108.83,4188.11 R11.1 ; SW1.2 SW1.1 2607.97,6478.35 2607.97,6620.41 2683.47,6695.91 3047.87,6695.91 C5.1@3081.25,6662.53 ; C5.1 C5.1@3081.25,6662.53 ; U7.10 3274.53,5986.94 ; U7.11 3274.53,6012.53 ; U7.12 3274.53,6038.12 3274.53,6012.53 ; Q1.2 3521.81,4000.13 AIN.1 3621.23,3931.62 LED3.2 ; U7.5 3493.35,5986.94 3495.01,5986.94 ; K2.1 3490.32,5087.53 3540.32,5037.53 3740.32,5037.53 3815.31,5112.53 H4.1 3840.32,5162.53 3890.32,5212.53 3890.32,6251.9 SW2.2 3627.23,6514.99 3553.41,6514.99 ; C5.1@3081.25,6662.53 3094.62,6662.53 3123.4,6691.31 3339.1,6691.31 3341.14,6689.27 3341.14,6662.53 3358.48,6662.53 C8.1 3479.69,6662.53 3553.41,6588.81 3553.41,6514.99 ; 3274.53,5986.94 3407.15,5854.32 3429.56,5854.32 3499.72,5924.48 3499.72,5982.23 3495.01,5986.94 ; 3274.53,5986.94 3274.53,6012.53 ; 3495.01,5986.94 3495.08,5987.01 3495.08,6187.06 3469.61,6212.53 C16.2 3442.87,6404.45 SW2.1 3553.41,6514.99
GP10: H1.7 U13.14 | length 1024.3
  Top Layer w10: U13.14 5120.93,5318.15 5120.93,5918.15 H1.7
GP11: H1.6 U13.15 | length 1024.3
  Top Layer w10: U13.15 5187.87,5285.09 5187.87,5885.09 H1.6
GP12: H1.5 U13.16 | length 1024.3
  Top Layer w10: U13.16 5255.64,5252.86 5255.64,5852.86 H1.5
GP13: H1.4 U13.17 | length 1024.3
  Top Layer w10: U13.17 5284.83,5182.05 5284.83,5782.05 H1.4
GP14: H1.3 U13.19 | length 1185.8
  Top Layer w10: U13.19 5055.25,4737.53 v1(5094.19,4776.47)
  Bottom Layer w10: v1(5094.19,4776.47) 5238.37,4920.65 5238.37,5188.08 5404.03,5353.74 5404.03,5673.81 H1.3
GP15: H1.2 U13.20 | length 1169.6
  Bottom Layer w10: U13.20 5081.37,4678.59 5081.37,4756.68 5071.13,4766.92 5071.13,4786.02 5081.37,4796.26 5081.37,5123.82 5384.84,5427.29 5384.84,5593 H1.2
HEAT: PIN1.1 U6.4 | length 247.4
  Bottom Layer w10: PIN1.1 4158.46,3144.4 4298.39,3144.4 U6.4
I2C_SCL: H1.8 U13.5 | length 341.4
  Bottom Layer w10: U13.5 5240.32,6137.53 H1.8
I2C_SDA: H1.9 U13.4 | length 325.3
  Bottom Layer w10: U13.4 5240.32,6237.53 H1.9@5328.94,6326.15
K1_2: K1.2 R33.1 | length 1004.8
  Bottom Layer w10: K1.2 2918.04,5290.25 2918.04,6087.46 2918.11,6087.53 R33.1
K2_2: K2.2 R29.2 | length 980.2
  Bottom Layer w10: K2.2 3590.32,6019.03 3658.82,6087.53 R29.2
KA1_3: KA1.3 R34.1 | length 1117.2
  Bottom Layer w10: KA1.3 2944.97,5114.03 R34.1
KA2_3: KA2.3 R30.2 | length 1119.5
  Top Layer w10: KA2.3 v2(3590.32,5062.53)
  Bottom Layer w10: v2(3590.32,5062.53) 3635.32,5107.53 3635.32,5957.53 3685.62,6007.83 R30.2@3685.62,6012.53 ; R30.2 3712.52,6012.53
L1_1: D2.1 L1.1 | length 126.2
  Bottom Layer w10: L1.1@4828.35,2887.54 4888.47,2887.54 4913.47,2862.54 D2.1
L2_1: D3.2 L2.1 | length 126.2
  Bottom Layer w10: L2.1@4828.35,3012.54 4888.47,3012.54 4913.47,2987.54 D3.2
LED1_1: LED1.1 R5.2 | length 241.1
  Bottom Layer w10: LED1.1 2690.31,3762.54 R5.2
LED2_1: LED2.1 R6.2 | length 191
  Bottom Layer w10: LED2.1 3190.31,3762.54 R6.2
LED3_1: LED3.1 R19.2 | length 116.1
  Bottom Layer w10: R19.2 3590.33,3762.54 LED3.1
LED4_1: LED4.1 R20.2 | length 241.1
  Bottom Layer w10: LED4.1 2690.31,3012.54 R20.2
OLED_SCL: H6.3 U13.2 | length 2929.1
  Bottom Layer w10: H6.3 4257.42,5129.63 4257.42,5495.43 4065.32,5687.53 4065.32,6562.53 4165.32,6662.53 4740.32,6662.53 4965.32,6437.53 U13.2
OLED_SCL_P: 1.3 H2.3 | length 1345.2
  Top Layer w10: 1.3 2690.32,5912.53 2690.32,5362.53 2634.12,5306.93 2634.12,5006.33 H2.3
OLED_SDA: H6.2 U13.1 | length 2879.6
  Bottom Layer w10: H6.2 4215.32,5187.53 4215.32,5462.53 4015.32,5662.53 4015.32,6587.53 4140.32,6712.53 4865.32,6712.53 U13.1
OLED_SDA_P: 1.4 H2.2 | length 1257.6
  Top Layer w10: H2.2 2495.82,5057.03 2495.82,5535.63 2540.32,5580.13 v2(2540.32,5662.53)
  Bottom Layer w10: 1.4 2540.32,6162.53 v2(2540.32,5662.53)
OUT_1: R1.1 U13.27 | length 1334.2
  Top Layer w10: U13.27 4539.99,5037.85 v1(4539.99,4861.57)
  Bottom Layer w10: v1(4539.99,4861.57) 4635.15,4861.57 5043.34,4453.38 5043.34,4303.4 5027.48,4287.54 R1.1
OUT_1_3: OUT_1.3 R3.2 | length 177.5
  Bottom Layer w10: OUT_1.3 2712.16,3637.54 R3.2
OUT_2: R2.1 U13.26 | length 1321.9
  Top Layer w10: U13.26 4514.74,4963.1 4514.74,4629.14 v1(4993.35,4150.53)
  Bottom Layer w10: v1(4993.35,4150.53) 4996.8,4147.08 R2.1
OUT_3: R15.1 U13.21 | length 568
  Top Layer w10: U13.21 4340.31,4180.76 v1(4377.63,4143.44)
  Bottom Layer w10: v1(4377.63,4143.44) 4383.83,4137.24 R15.1
OUT_4: R17.1 U13.22 | length 473.3
  Top Layer w10: U13.22 4390.18,4687.66 v1(4390.18,4327.36)
  Bottom Layer w10: R17.1 4383.83,4321.01 v1(4390.18,4327.36)
OUT_5: R21.1 U13.24 | length 1907.4
  Top Layer w10: U13.24 4458.02,4819.82 4458.02,3991.6 v1(5060.62,3389)
  Bottom Layer w10: R21.1 5052.48,3362.54 5052.48,3380.86 v1(5060.62,3389)
OUT_6: R68.1 U13.25 | length 1919.5
  Top Layer w10: v1(4200.9,4800.73) 4200.9,3409.02 v1(4315.17,3294.75)
  Bottom Layer w10: v1(4200.9,4800.73) 4200.9,4898.12 U13.25 ; v1(4315.17,3294.75) 4322.38,3287.54 R68.1
OUT_6_3: OUT_6.3 R64.2 | length 152.5
  Bottom Layer w10: R64.2 3668.48,2887.54 OUT_6.3
R4_2: OUT_2.3 R4.2 | length 127.5
  Bottom Layer w10: OUT_2.3 3212.16,3637.54 R4.2
R7_2: C6.2 R7.2 R29.1 R30.1 R42.2 U7.9 | length 2274.7
  Bottom Layer w10: R42.2 3162.53,4712.53 3162.53,4739.4 3285.54,4862.41 3285.54,5820.2 ; U7.9@3230.08,5961.35 3185.62,5961.35 3185.55,5961.28 3185.55,5920.19 3285.54,5820.2 ; R7.2 3685.66,6209.53 3687.76,6207.43 C6.2 C6.2@3687.76,6148.18 ; R30.1 R29.1 3718.1,6087.53 3718.1,6114.4 3698.67,6133.83 3687.76,6133.83 C6.2@3687.76,6148.18 ; 3285.54,5820.2 3449.28,5820.2 3558.97,5929.89 3558.97,6019.39 C6.2@3687.76,6148.18
R11_2: Q1.1 R10.2 R11.2 | length 264.1
  Bottom Layer w10: R10.2 3169.98,4078.05 3171.82,4079.89 3171.82,4088.05 ; R11.2 3171.82,4088.05 ; Q1.1 3319.09,4074.93 3305.97,4088.05 3171.82,4088.05
R16_2: OUT_3.3 R16.2 | length 152.5
  Bottom Layer w10: R16.2 3668.48,3637.54 OUT_3.3
R18_2: OUT_4.3 R18.2 | length 177.5
  Bottom Layer w10: OUT_4.3 2712.16,2887.54 R18.2
R21_2: C9.1 R21.2 U8.3 | length 559.3
  Bottom Layer w10: U8.3 R21.2 4989.49,3362.54 4989.49,3393.22 5009.61,3413.34 5225.74,3413.34 C9.1
R22_2: R22.2 R41.1 U8.2 | length 307.1
  Bottom Layer w10: U8.2 4883.79,3412.54 4933.79,3462.54 R22.2 4971.84,3462.54 4987.52,3462.54 4987.52,3489.4 5007.66,3509.54 5019.97,3509.54 R41.1
R31_1: C7.1 R31.1 R33.2 R34.2 R43.2 U7.6 | length 2481.6
  Top Layer w10: v1(2893.66,5959.4) 3057.46,5795.6 v1(3057.46,4647.14)
  Bottom Layer w10: R31.1 R31.1@2885.66,6224.71 ; v1(2893.66,5959.4) 2885.66,5967.4 R34.2 R33.2 2885.66,6115.53 2887.76,6117.63 2887.76,6133.83 C7.1 2887.76,6207.43 2885.66,6209.53 R31.1@2885.66,6224.71 ; v1(3057.46,4647.14) 3067.07,4637.53 R43.2 ; U7.6 3406.1,5961.35 3371.7,5995.75 3371.7,6033.53 3135.69,6269.54 2925.54,6269.54 2885.67,6229.67 R31.1@2885.67,6224.71
R32_2: JP1.3 R32.2 | length 102.8
  Bottom Layer w10: JP1.3 3076.31,4505.53 3094.31,4487.53 R32.2
R36_2: JP1.1 R32.1 R36.2 | length 229.3
  Bottom Layer w10: JP1.1 3101.8,4569.53 3108.8,4562.53 R36.2 3162.53,4562.53 3162.53,4535.66 3168.11,4530.08 3168.11,4487.53 R32.1
R38_1: R38.1 SW2.3 SW2.4 | length 362.4
  Top Layer w10: SW2.4 SW2.3
  Bottom Layer w10: R38.1 3423.79,6562.53 SW2.4
R54_2: LED5.1 R54.2 | length 191
  Bottom Layer w10: LED5.1 3190.31,3012.54 R54.2
R55_2: OUT_5.3 R55.2 | length 127.5
  Bottom Layer w10: OUT_5.3 3212.16,2887.54 R55.2
R65_2: LED6.1 R65.2 | length 116.1
  Bottom Layer w10: R65.2 3590.33,3012.54 LED6.1
R66_1: R66.1 R67.2 U8.6 | length 280.2
  Bottom Layer w10: R66.1 4412.53,3462.54 4412.53,3419.98 4418.11,3414.4 4418.11,3387.54 R67.2 4558.81,3387.54 U8.6
RUN: H1.10 U13.30 | length 1717.6
  Bottom Layer w10: U13.30 4865.32,5537.53 4945.62,5617.83 4945.62,6206.43 5032.42,6293.23 5196.02,6293.23 H1.10
S$1126: 
S$12108: 
S$12153: 
S$12203: 
S$12207: 
S$12211: 
S$12730: 
S$74496: 
S$83869: 
SW1_3: R28.1 SW1.3 SW1.4 | length 362.4
  Bottom Layer w10: SW1.4 SW1.3 2956.85,6562.53 R28.1
SW_1: H5.6 U13.6 | length 1696.4
  Top Layer w10: U13.6 4975.89,5973.11 4975.89,4825.75 5008.44,4793.2 5078.31,4793.2 5084.64,4799.53 5153.31,4799.53 H5.6
SW_1P: C5.2 H4.6 R28.2 R37.1 | length 2508.4
  Top Layer w10: v1(3106.57,6409) 3733.27,5782.3 3733.27,5053.78 3824.54,4962.51 3858.14,4962.51 3890.35,4930.3 3890.35,4662.56 H4.6
  Bottom Layer w10: C5.2 3039.5,6662.53 3039.5,6594.85 3041.14,6593.21 3041.14,6562.53 R28.2 3071.82,6442.37 3069.98,6440.53 R37.1 3096.84,6412.53 3100.37,6409 v1(3106.57,6409)
SW_2: H5.5 U13.7 | length 1467.6
  Top Layer w10: U13.7 4996.93,5894.15 4996.93,4915.17 5030.23,4881.87 5170.97,4881.87 H5.5
SW_2P: C8.2 H4.5 R38.2 R58.1 | length 2275.8
  Top Layer w10: v1(3310.66,6473.83) 3891.83,5892.66 v1(3891.83,4961.42)
  Bottom Layer w10: R58.1 3310.66,6440.53 v1(3310.66,6473.83) 3308.82,6475.67 R38.2 3308.82,6595.17 3312.76,6599.11 C8.2 ; H4.5 3891.83,4764.04 v1(3891.83,4961.42)
U2_2: R8.1 R12.2 U2.2 | length 407.3
  Bottom Layer w10: U2.2 4833.8,4287.54 4908.79,4362.53 R12.2@4922.23,4362.53 ; R12.2 R12.2@4922.23,4362.53 ; R8.1 5021.83,4437.53 5023.48,4435.88 5023.48,4340.61 5017.34,4334.47 4950.29,4334.47 R12.2@4922.23,4362.53
U2_3: C1.1 R1.2 U2.3 | length 746.3
  Bottom Layer w10: U2.3 4853.14,4237.54 4903.14,4287.54 R1.2@4918.48,4287.54 ; R1.2 R1.2@4918.48,4287.54 ; C1.1 4990.31,3869.02 5006.63,3869.02 5049.91,3912.3 5049.91,4186.43 5013.64,4222.7 4983.32,4222.7 R1.2@4918.48,4287.54
U2_5: C2.1 R2.2 U2.5 | length 472.2
  Top Layer w10: v1(4806.66,3893.06) 4806.66,4022.77 v1(4869.41,4085.52)
  Bottom Layer w10: C2.1 4790.31,3876.71 v1(4806.66,3893.06) ; U2.5 4817.39,4137.54 v1(4869.41,4085.52) 4871.42,4087.53 4925.27,4087.53 R2.2
U2_6: R9.1 R13.2 U2.6 | length 287.6
  Bottom Layer w10: U2.6 4833.78,4087.54 4908.79,4012.53 R13.2@4922.23,4012.53 ; R13.2 R13.2@4922.23,4012.53 ; R9.1 4994.97,3965.53 4969.23,3965.53 R13.2@4922.23,4012.53
U2_9: R23.1 R25.2 U2.9 | length 539
  Bottom Layer w10: R25.2 4418.11,4012.54 4418.11,3985.68 4397.97,3965.54 4385.66,3965.54 R23.1 4412.53,3937.54 4412.53,3910.67 4414.69,3908.51 4517.05,3908.51 4632.68,4024.14 4632.68,4051.72 4596.86,4087.54 U2.9
U2_10: C3.1 R15.2 U2.10 | length 550.8
  Bottom Layer w10: R15.2 4477.49,4087.54 4527.49,4137.54 U2.10 4592.89,4137.54 4651.19,4079.24 4651.19,3929.89 4590.32,3869.02 C3.1
U2_12: C4.1 R17.2 U2.12 | length 666.4
  Top Layer w10: v1(4392.39,3897.84) 4403.82,3909.27 4403.82,4212.46 v1(4434.96,4243.6)
  Bottom Layer w10: C4.1 4390.32,3895.77 v1(4392.39,3897.84) ; v1(4434.96,4243.6) 4434.96,4268.01 R17.2@4454.49,4287.54 ; R17.2 R17.2@4454.49,4287.54 ; U2.12 4527.49,4237.54 4477.49,4287.54 R17.2@4454.49,4287.54
U2_13: R24.1 R26.2 U2.13 | length 287.6
  Bottom Layer w10: R24.1 4385.66,4409.54 4411.41,4409.54 R26.2@4458.41,4362.54 ; R26.2 R26.2@4458.41,4362.54 ; U2.13 4546.84,4287.54 4471.84,4362.54 R26.2@4458.41,4362.54
U7_13: C21.1 JP1.2 R35.2 R39.1 U7.13 | length 2097.9
  Bottom Layer w10: JP1.2 3004.33,4537.53 ; R35.2 R35.2@3135.66,4398.53 ; R39.1 3194.98,4290.53 3192.88,4292.63 C21.1 3166.14,4337.53 3166.14,4364.27 3145.88,4384.53 3135.66,4384.53 R35.2@3135.66,4398.53 ; U7.13 3185.62,6063.71 3116.27,5994.36 3116.27,4762.69 3004.26,4650.68 3004.26,4537.6 3004.33,4537.53 ; 3004.33,4537.53 3004.27,4537.47 3004.27,4484.83 3090.57,4398.53 R35.2@3135.66,4398.53
pads on no net: AIN. AIN.2 DIN. DIN.2 K1.4 K2.4 KA1. KA2. OUT_1. OUT_1.2 OUT_2. OUT_2.2 OUT_3. OUT_3.2 OUT_4. OUT_4.2 OUT_5. OUT_5.2 OUT_6. OUT_6.2 U1.3 U7.1 U7.2 U7.3 U13.9 U13.10 U13.11 U13.12 U13.35 U13.37 U13.40 U13.41 U13.42 U13.43

## Polygon pours and split planes (outlines as drawn)
HEAT on Top Layer (solid): 3990.32,3212.53 4040.32,3262.53 4290.31,3262.53 4340.31,3212.53 4340.31,3087.53 4340.31,2962.54 4290.31,2912.54 4040.32,2912.54 3990.32,2962.54
HEAT on Bottom Layer (solid): 3990.32,3187.53 3990.32,3262.53 4240.31,3262.53 4290.31,3262.53 4340.31,3212.53 4340.31,3037.53 4040.32,3037.53 3990.32,3087.53

## Silkscreen, mask and mechanical layers (free items; w line width, h text height)
Top Overlay:
  lines w10 net S$12108: 4490.31,6162.53 4540.31,6112.53 4590.31,6112.53 4640.31,6162.53 4640.31,6212.53 4590.31,6262.53 4540.31,6262.53 4490.31,6212.53 4490.31,6162.53 ; 4740.31,6162.53 4790.31,6112.53 4840.31,6112.53 4890.31,6162.53 4890.31,6212.53 4840.31,6262.53 4790.31,6262.53 4740.31,6212.53 4740.31,6162.53
  lines w10 net S$12153: 4490.31,5962.53 4490.31,6012.53 4540.31,6062.53 4840.31,6062.53 4890.31,6012.53 4890.31,5962.53 4840.31,5912.53 4540.31,5912.53 4490.31,5962.53
  lines w10 net S$12203: 4591.04,5912.53 4591.04,6062.53
  lines w10 net S$12207: 4690.31,5912.53 4690.31,6062.53
  lines w10 net S$12211: 4788.38,5912.53 4788.38,6062.53
  lines w10 net S$12730: 4440.31,5862.53 4940.31,5862.53 4940.31,6262.53 4890.31,6312.53 4490.31,6312.53 4440.31,6262.53 4440.31,5862.53
  lines w10 net S$83869: 3090.32,5012.53 3140.32,4962.53 3240.32,4962.53 3290.32,5012.53 3290.32,5112.53 3240.32,5162.53 3140.32,5162.53 3090.32,5112.53 3090.32,5012.53
Bottom Overlay:
  lines w10 net S$83869: 4590.32,5012.53 4640.32,4962.53 4740.32,4962.53 4790.32,5012.53 4790.31,5112.53 4740.31,5162.53 4640.32,5162.53 4590.32,5112.53 4590.32,5012.53
  text "Run / SDA / SCL / P10 / P11 / P12 / P13 / P14 / P15 / GND" at 5265.32,6412.53 h62.99 r90
  text "Europip the remix v1.0 / Allen-Synthesis ft. Lui" at 4135,6212.53 h39.37 r90
  text "git@luisgongod" at 4915.32,5742.84 h39.37
  text "U" at 3127.45,4676.39 h80 r90
  text "B" at 3127.45,4443.52 h80 r90
Document:
  lines w10 net S$74496: 3940.32,2412.54 3940.32,6762.53
  text "V Cut" at 3985,6812.53 h39.37 r90

## Text inside footprints (layer, text, board x,y; h text height)
1: Top Overlay "GND" at 2540.32,5897.53 h30; Top Overlay "VCC" at 2540.32,5997.53 h30; Top Overlay "SCL" at 2540.32,6097.53 h30; Top Overlay "SDA" at 2540.32,6197.53 h30